# Altium PCB PCB_2020-01-08 14_42_13.pcbdoc
Units mil, origin at the board's own origin, x right, y up, seen from the top; angles counter-clockwise.
Board outline 5600 x 5605 mil, 2 copper layers (Top Layer, Bottom Layer); 29 components, 17 nets, 100 pads, 0 vias.
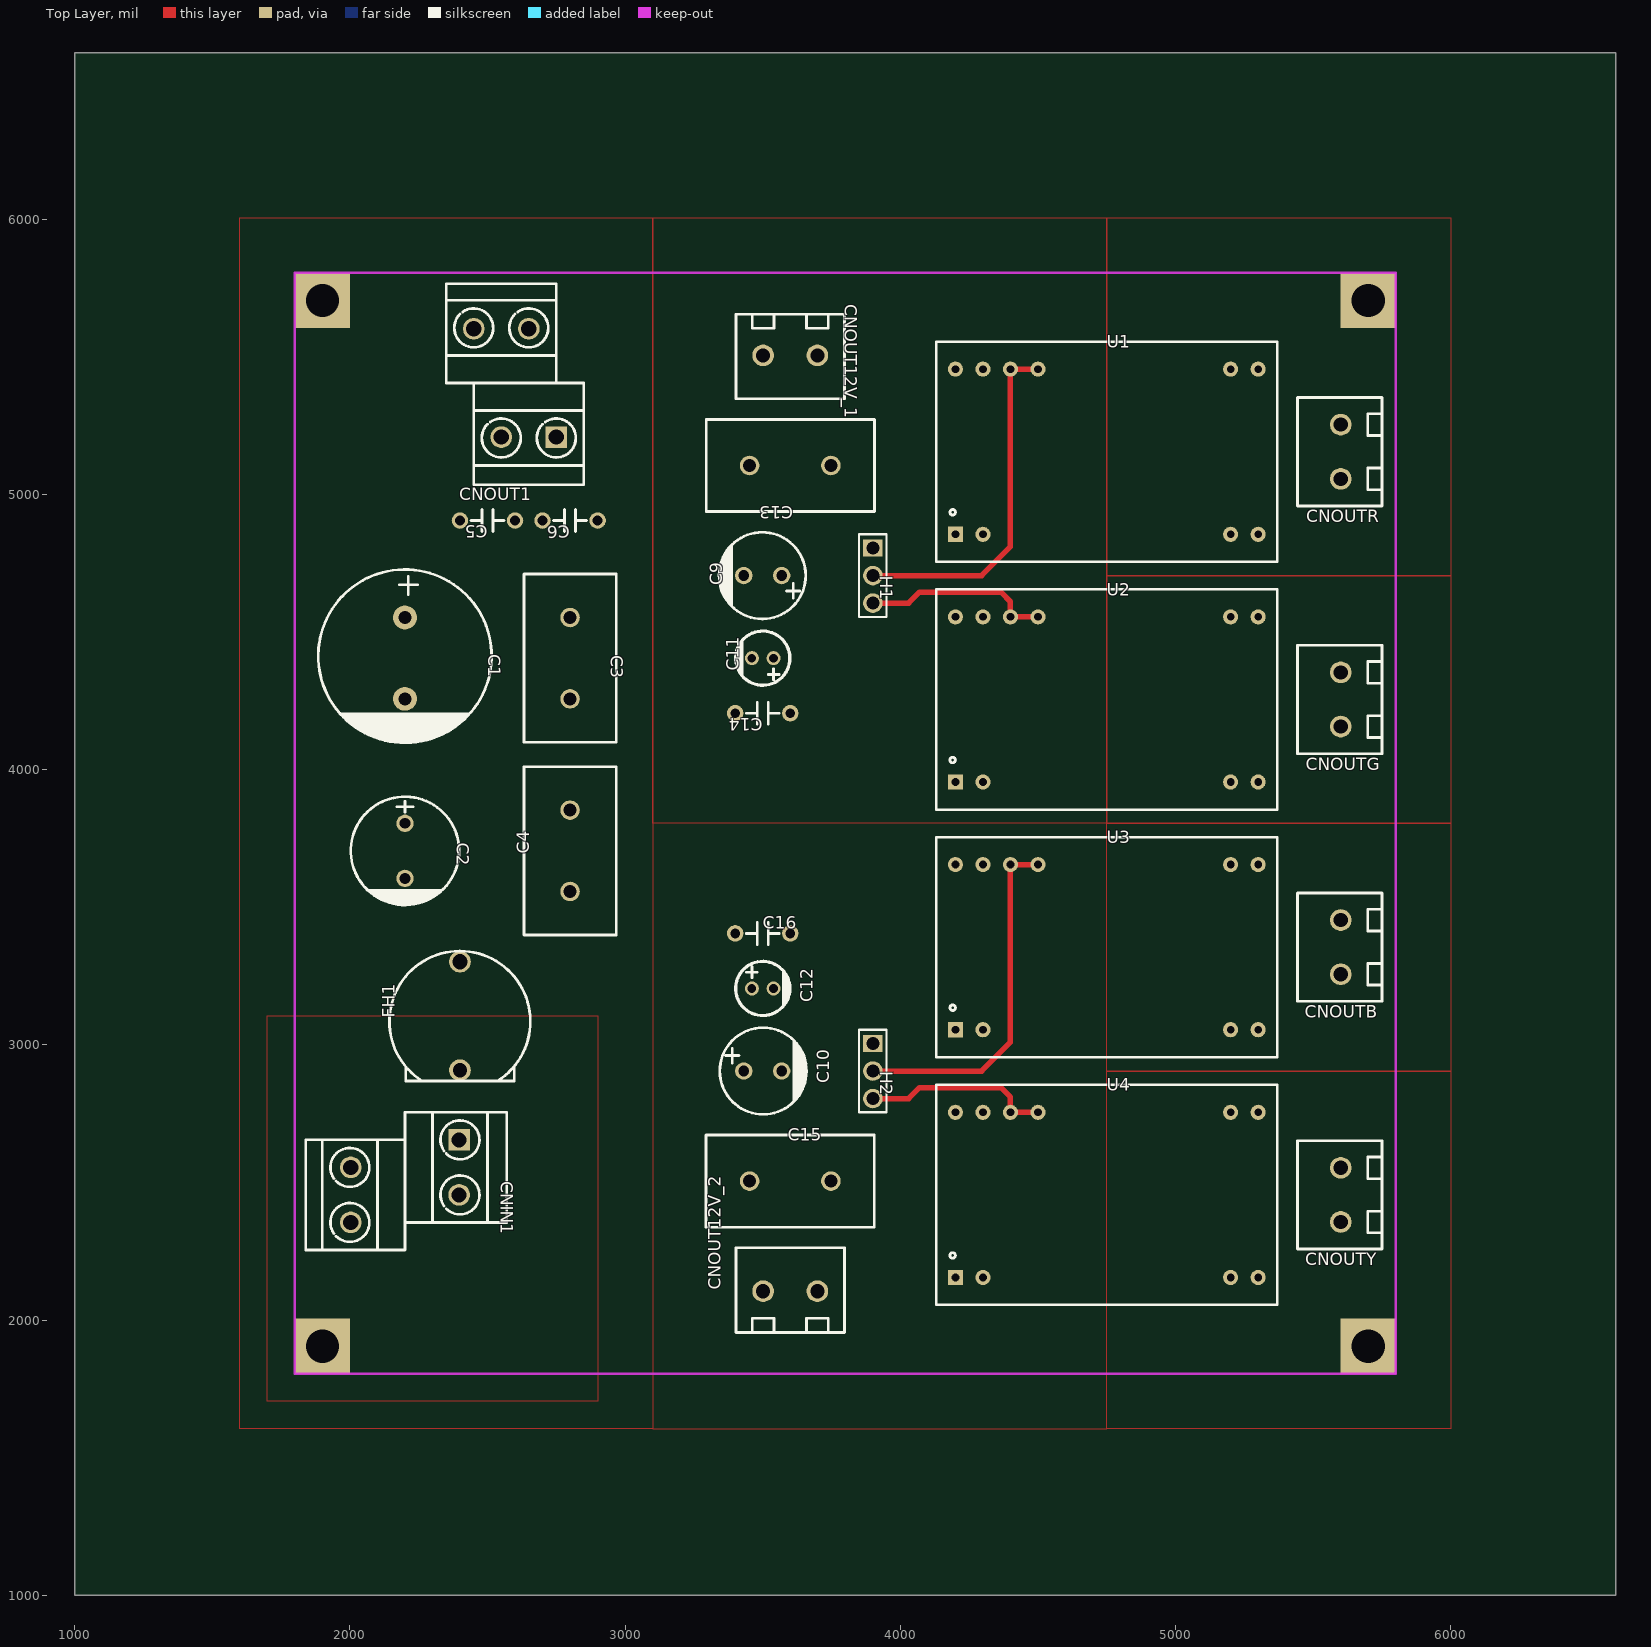
[diagram p0: Top Layer view]
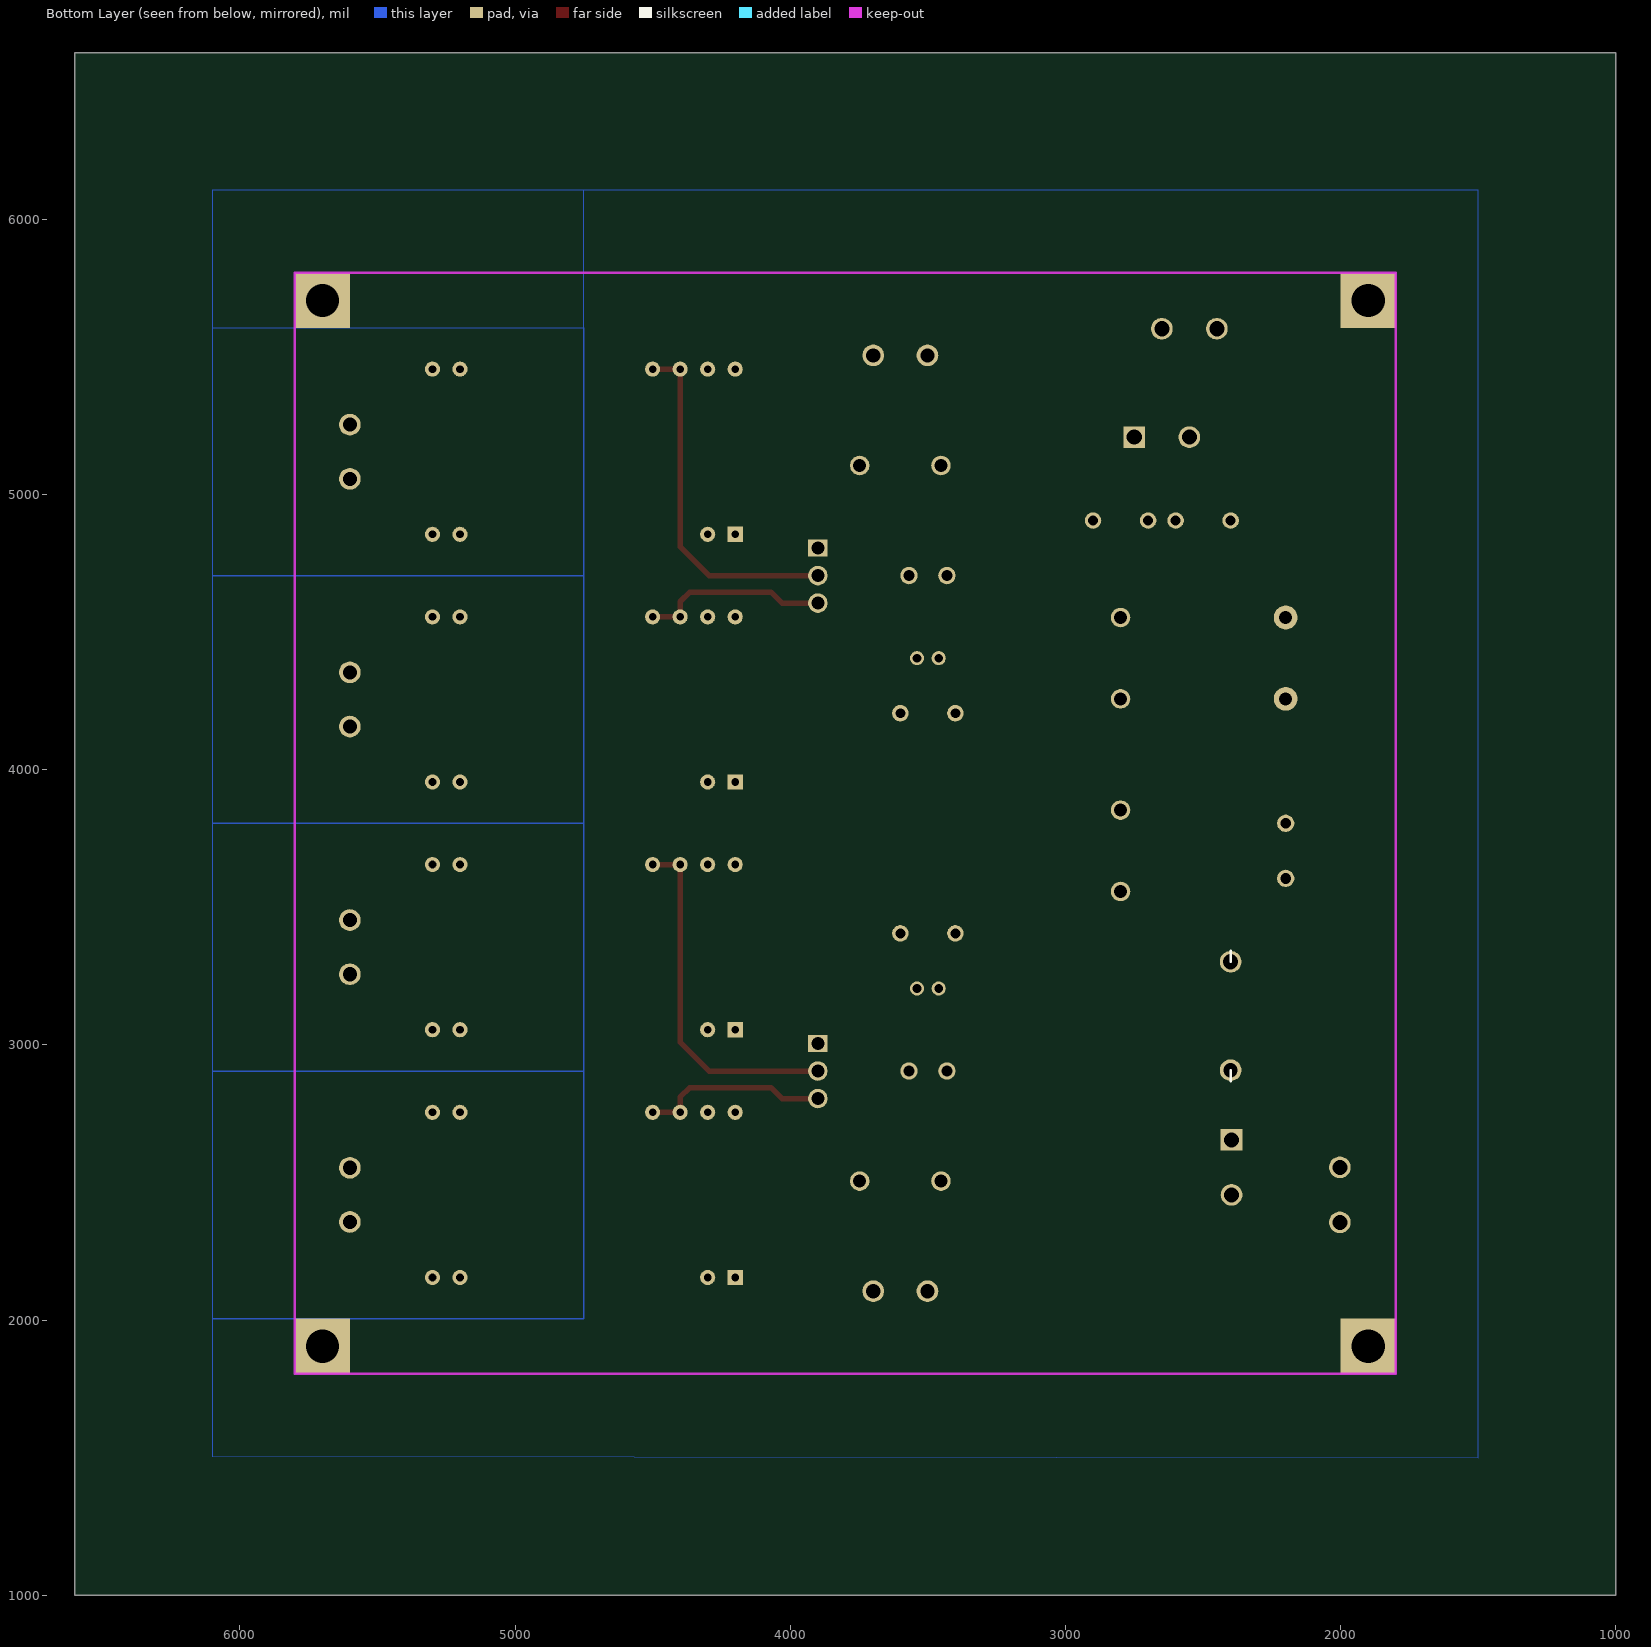
[diagram p1: Bottom Layer view, seen from below]

## Layer stack, top to bottom
Top Layer: signal copper (thickness not stored)
Dielectric: dielectric 12.6, FR-4, Dk 4.8
Bottom Layer: signal copper (thickness not stored)

## Board outline
6600,1000 1000,1000 1000,6605 6600,6605

## Components (designator, comment, footprint, x,y, rotation, side; value= is the part's Value field where it differs from the comment)
C1 "4700uF" CAP-TH_BD16.0-P7.50-D1.2-FD 2200,4405 r270 top
C2 "1000uF" CAP-TH_BD10.0-P5.00-D1.0-FD 2200,3705 r270 top
C3 "10uF" CAP-TH_L15.5-W8.5-P7.50-D1.2 2800,4405 r270 top
C4 "10uF" CAP-TH_L15.5-W8.5-P7.50-D1.2 2800,3705 r90 top
C5 "2.2uF" CAP-0.2 2500,4905 r180 top
C6 "2.2uF" CAP-0.2 2800,4905 r180 top
C9 "470uF" CAP-TH_BD8.0-P3.50-D1.0-FD 3500,4705 r180 top
C10 "470uF" CAP-TH_BD8.0-P3.50-D1.0-FD 3500,2905 r0 top
C11 "100uF" CAP-TH_BD5.0-P2.00-D0.8-FD 3500,4405 r180 top
C12 "100uF" CAP-TH_BD5.0-P2.00-D0.8-FD 3500,3205 r0 top
C13 "10uF" CAP-TH_L15.5-W8.5-P7.50-D1.2 3600,5105 r180 top
C14 "2.2uF" CAP-0.2 3500,4205 r180 top
C15 "10uF" CAP-TH_L15.5-W8.5-P7.50-D1.2 3600,2505 r0 top
C16 "2.2uF" CAP-0.2 3500,3405 r0 top
CNIN1 "EELK508V-04P" EELK508V-04P 2200,2505 r270 top
CNOUT1 "EELK508V-04P" EELK508V-04P 2600,5405 r180 top
CNOUT12V_1 "WJ126V-5.0-2P" WJ126V-5.0-2P 3600,5505 r270 top
CNOUT12V_2 "WJ126V-5.0-2P" WJ126V-5.0-2P 3600,2105 r90 top
CNOUTB "WJ126V-5.0-2P" WJ126V-5.0-2P 5600,3355 r180 top
CNOUTG "WJ126V-5.0-2P" WJ126V-5.0-2P 5600,4255 r180 top
CNOUTR "WJ126V-5.0-2P" WJ126V-5.0-2P 5600,5155 r180 top
CNOUTY "WJ126V-5.0-2P" WJ126V-5.0-2P 5600,2455 r180 top
FH1 "Fuse-holder - C268208" "FUSE-HOLDER- C268208" 2400,3105 r90 top
H1 "Header-Male-2.54_1x3" HDR-TH_3P-P2.54-V 3900,4705 r270 top
H2 "Header-Male-2.54_1x3" HDR-TH_3P-P2.54-V 3900,2905 r270 top
U1 "LDD-H" LDD-H 4200,4855 r0 top
U2 "LDD-H" LDD-H 4200,3955 r0 top
U3 "LDD-H" LDD-H 4200,3055 r0 top
U4 "LDD-H" LDD-H 4200,2155 r0 top

## Footprints (in the part's own frame and the unit in brackets; to place one, negate y for a bottom-side part, rotate by r counter-clockwise, add the part's x,y. Pads: shape width x height; smd on the part's side, far side on the other; paste and mask are expansions set on the pad)
CAP-0.2 [mil]
  round 60 hole 36: 1(-100,0) 2(100,0)
  silkscreen extent -60,-40 60,40
CAP-TH_BD5.0-P2.00-D0.8-FD [mm]
  round 1.3 hole 0.8: 1(-1,0) 2(1,0)
  silkscreen extent -2.5,-2.5 2.5,2.5
CAP-TH_BD8.0-P3.50-D1.0-FD [mm]
  round 1.6 hole 1: 1(-1.75,0) 2(1.75,0)
  silkscreen extent -3.96,-4 4.04,4
CAP-TH_BD10.0-P5.00-D1.0-FD [mm]
  round 1.6 hole 1: 1(-2.54,0) 2(2.54,0)
  silkscreen extent -5,-4.99 5.08,5
CAP-TH_BD16.0-P7.50-D1.2-FD [mm]
  round 2.2 hole 1.2: 1(-3.75,0) 2(3.75,0)
  silkscreen extent -8.19,-8 7.81,8
CAP-TH_L15.5-W8.5-P7.50-D1.2 [mm]
  round 1.8 hole 1.2: 1(-3.75,0) 2(3.75,0)
  silkscreen extent -7.77,-4.25 7.75,4.25
EELK508V-04P [mm]
  rect 2x2 hole 1.4: 1(-3.81,5)
  round 2 hole 1.4: 2(-1.27,-5) 3(1.27,5) 4(3.81,-5)
  silkscreen extent -6.35,-9.14 6.35,9.4
"FUSE-HOLDER- C268208" [mm]
  round 2 hole 1.3: 1(-5.005,0)
  round 2 hole 1.4: 2(5.005,0)
  silkscreen extent -6.01,-6.49 6,6.51
HDR-TH_3P-P2.54-V [mm]
  rect 1.575x1.8 hole 1.2: 1(-2.54,0)
  round 1.8 hole 1.2: 2(0,0) 3(2.54,0)
  silkscreen extent -3.81,-1.27 3.81,1.27
LDD-H [mil]
  rect 55x55 hole 28: 1(0,0)
  round 55 hole 28: 2(100,0) 11(1000,0) 12(1100,0) 13(1100,600) 14(1000,600) 21(300,600) 22(200,600) 23(100,600) 24(0,600)
  silkscreen extent -70,-100 1170,700
WJ126V-5.0-2P [mm]
  round 2 hole 1.3: 1(0,2.501) 2(0,-2.501)
  silkscreen extent -3.8,-5 4,5

## Free pads (board coordinates)
  rect 200x200 hole 120: 1(1900,1905) 1(1900,5705) 1(5700,1905) 1(5700,5705)

## Nets (pads, with @x,y where several pads share a name; then routed paths per layer and width w, separated by ;. In a path a pad name is that pad's centre, name@x,y a point inside that pad or via, vN(x,y) a via of type N, cw(c..) or ccw(c..) an arc to the next point about the centre after c; other vN are vias at no path point)
+12V: C1.1 C2.1 C3.1 C4.1 C5.1 C6.1 CNOUT1.1 CNOUT1.2 FH1.2
GND: C1.2 C2.2 C3.2 C4.2 C5.2 C6.2 C9.2 C10.2 C11.2 C12.2 C13.2 C14.2 C15.2 C16.2 CNIN1.3 CNIN1.4 CNOUT1.3 CNOUT1.4 CNOUT12V_1.2 CNOUT12V_2.2 H1.1 H2.1 pad.1 U1.1 U1.2 U2.1 U2.2 U3.1 U3.2 U4.1 U4.2
PWMB: H2.2 U3.21 U3.22 | length 1288.5
  Top Layer w20: H2.2 4295,2905 4400,3010 U3.22 U3.21
PWMG: H1.3 U2.21 U2.22 | length 686.1
  Top Layer w20: H1.3 4030,4605 4070,4645 4365,4645 4400,4610 U2.22 U2.21
PWMR: H1.2 U1.21 U1.22 | length 1288.5
  Top Layer w20: H1.2 4295,4705 4400,4810 U1.22 U1.21
PWMY: H2.3 U4.21 U4.22 | length 686.1
  Top Layer w20: H2.3 4030,2805 4070,2845 4365,2845 4400,2810 U4.22 U4.21
VB+: CNOUTB.2 U3.13 U3.14
VB-: CNOUTB.1 U3.11 U3.12
VCC1: C9.1 C11.1 C13.1 C14.1 CNOUT12V_1.1 U1.23 U1.24 U2.23 U2.24
VCC2: C10.1 C12.1 C15.1 C16.1 CNOUT12V_2.1 U3.23 U3.24 U4.23 U4.24
VG+: CNOUTG.2 U2.13 U2.14
VG-: CNOUTG.1 U2.11 U2.12
VIN: CNIN1.1 CNIN1.2 FH1.1
VR+: CNOUTR.2 U1.13 U1.14
VR-: CNOUTR.1 U1.11 U1.12
VY+: CNOUTY.2 U4.13 U4.14
VY-: CNOUTY.1 U4.11 U4.12

## Polygon pours and split planes (outlines as drawn)
VIN on Top Layer (solid): 1700,3105 2900,3105 2900,1705 1700,1705
+12V on Top Layer (solid): 1600,6005 3100,6005 3100,1605 1600,1605
VCC1 on Top Layer (solid): 3100,6005 4750,6005 4750,3805 3100,3805
VCC2 on Top Layer (solid): 3100,1605 4750,1605 4750,3805 3100,3805
GND on Bottom Layer (solid): 1500,6105 6100,6105 6100,5605 4750,5605 4750,2005 6100,2005 6100,1505 1500,1500
VR+ on Top Layer (solid): 4750,6005 6000,6005 6000,4705 4750,4705
VR- on Bottom Layer (solid): 6100,6105 6100,4705 4750,4705 4750,6105
VG+ on Top Layer (solid): 4750,4705 6000,4705 6000,3805 4750,3805
VB+ on Top Layer (solid): 4750,3805 6000,3805 6000,2905 4750,2905
VY+ on Top Layer (solid): 4750,2905 6000,2905 6000,1605 4750,1605
VG- on Bottom Layer (solid): 4750,4705 6100,4705 6100,3805 4750,3805
VB- on Bottom Layer (solid): 4750,3805 6100,3805 6100,2905 4750,2905
VY- on Bottom Layer (solid): 4750,2905 6100,2905 6100,2005 4750,2005

## Silkscreen, mask and mechanical layers (free items; w line width, h text height)
Document:
  lines w0.1: 3799,3801.5 3801,3803.5